# EAGLE board MegaShield_v0.6 (EAGLE 6.4)
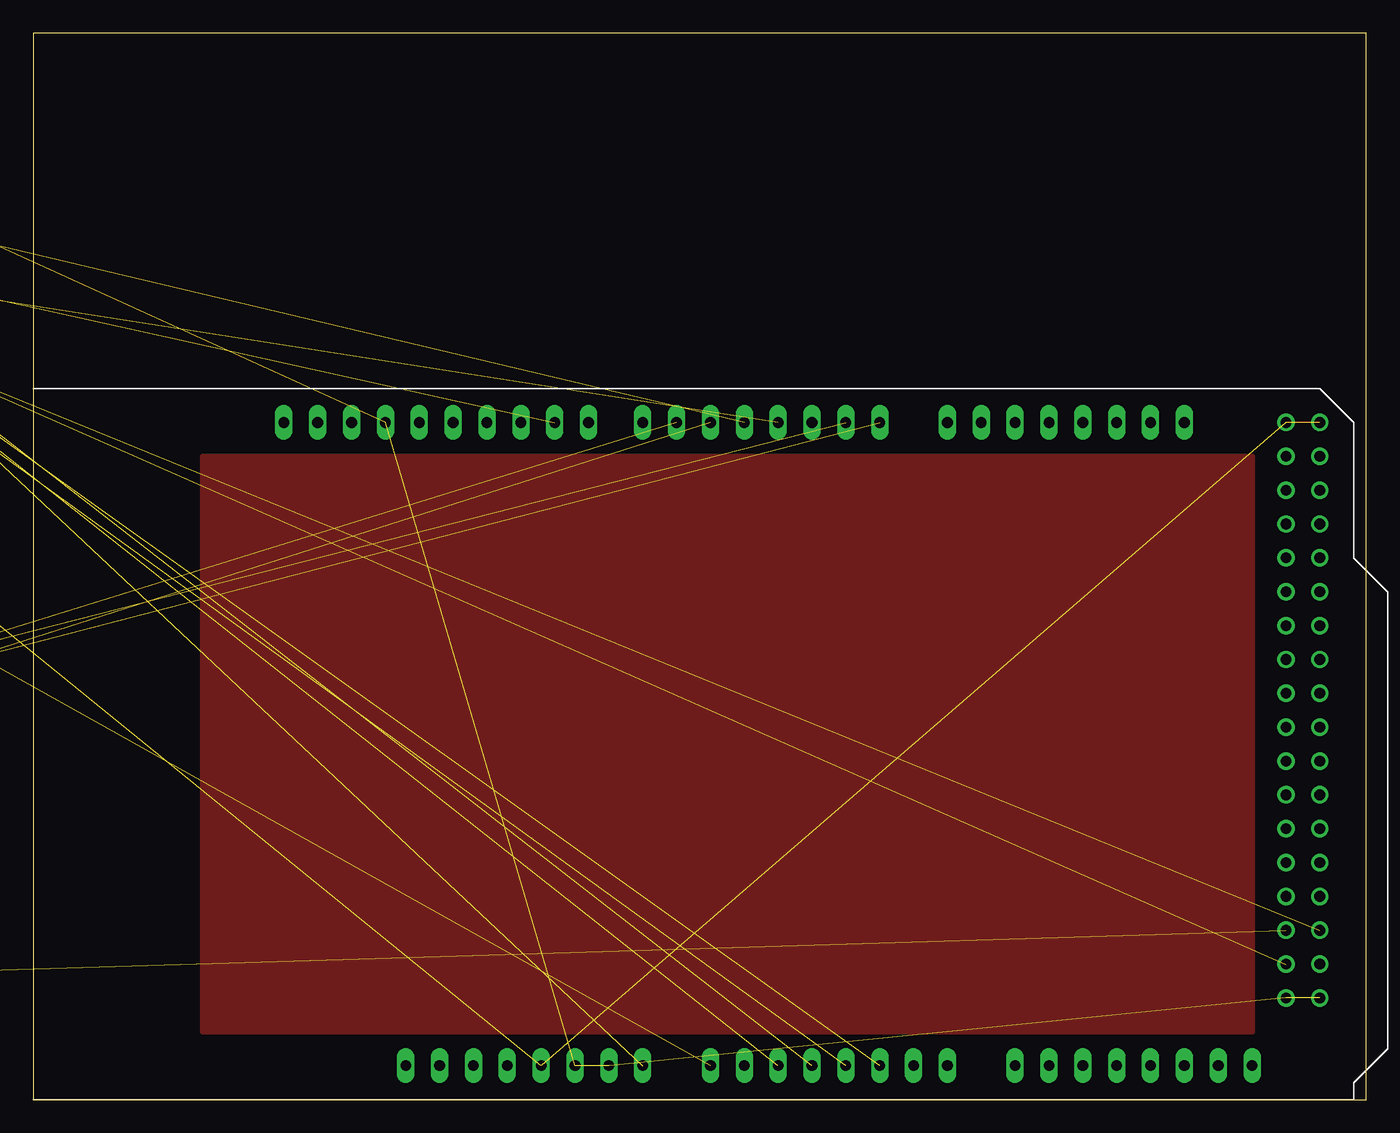
[diagram p0: board, top side]
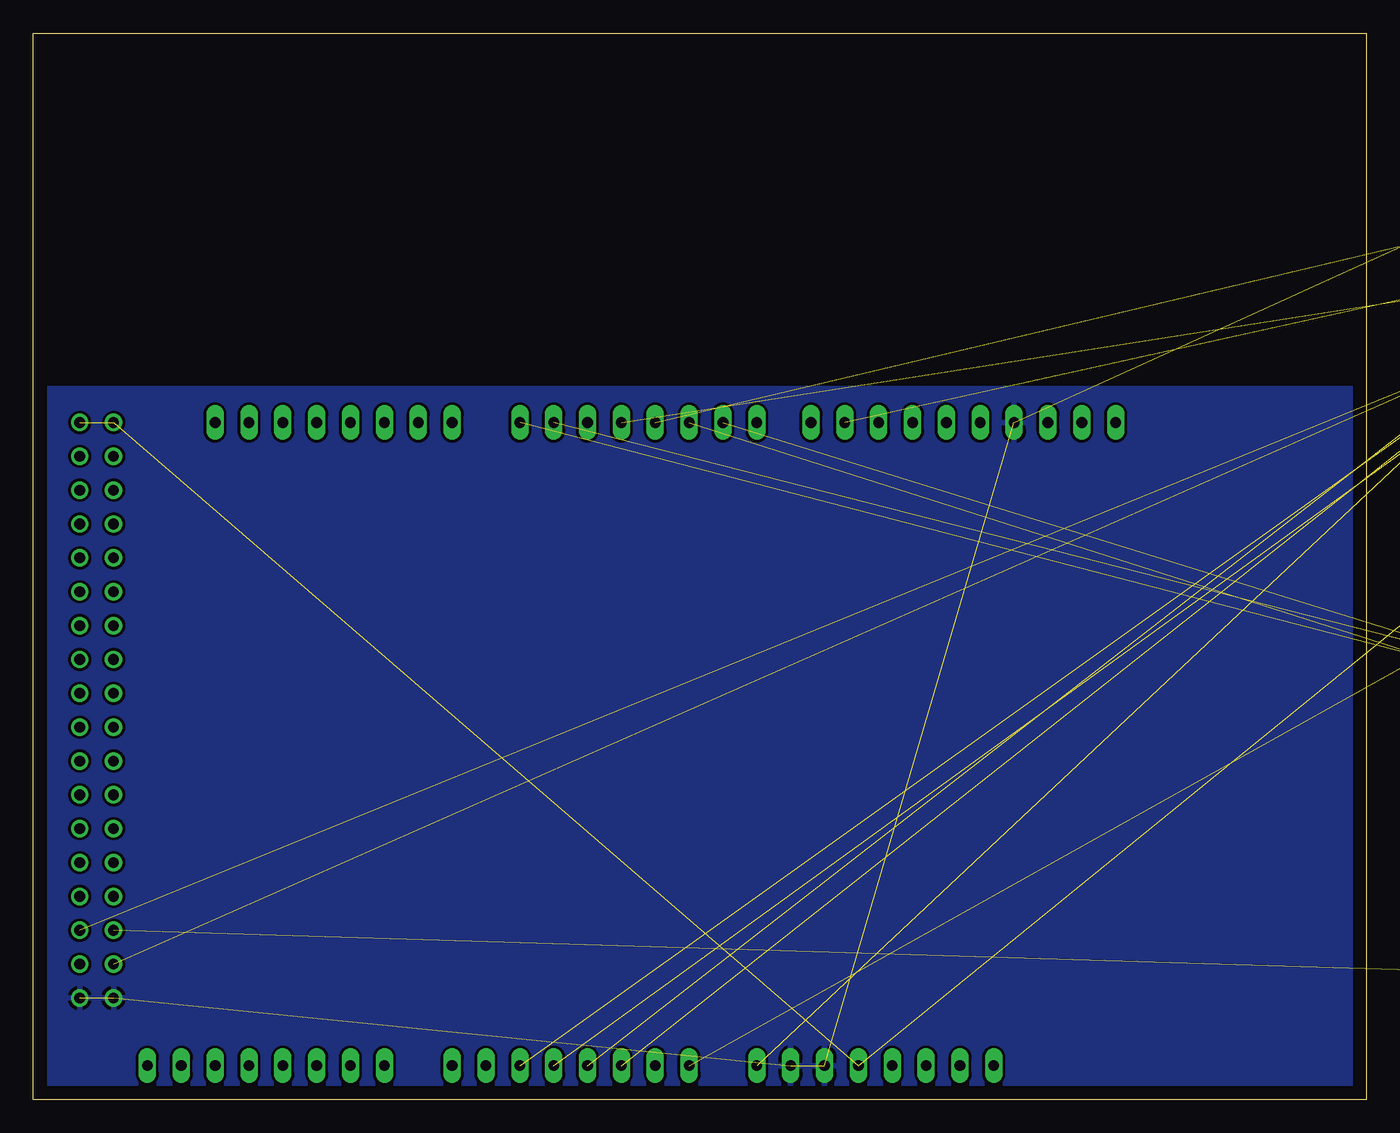
[diagram p1: board, bottom side, seen from below]

Size 100 x 80 mm. Coordinates in mm from the lower left corner, seen from the top.
Outline: 0,0 100,0 100,80 0,80 0,0
Copper layers (1*16): Top 0.035mm / dielectric 1.5mm / Bottom 0.035mm
Design rules "default": minimum track width 10mil, minimum drill 24mil, track to track 8mil, track to pad 8mil, pad to pad 8mil, via to via 8mil, smd to smd 8mil, copper to edge 40mil, drill to drill 8mil, minimum pad ring 10mil, minimum via ring 8mil, stop-mask expansion 4mil, vias tented up to drill 0mil, thermal gap 10mil

## Footprints (pad centres in the part's own frame; a part is rotated, then mirrored left to right if it is on the bottom)
0805 = smd 0.8 x 1.2: 1 -0.9,0; 2 0.9,0
SO16 = smd 0.6 x 1.2: 1 -4.445,-2.8; 2 -3.175,-2.8; 3 -1.905,-2.8; 4 -0.635,-2.8; 5 0.635,-2.8; 6 1.905,-2.8; 7 3.175,-2.8; 8 4.445,-2.8; 9 4.445,2.8; 10 3.175,2.8; 11 1.905,2.8; 12 0.635,2.8; 13 -0.635,2.8; 14 -1.905,2.8; 15 -3.175,2.8; 16 -4.445,2.8
1X16_LOCK = drill 1.016 pad 1.88: 1 0,0.127; 2 2.54,-0.127; 3 5.08,0.127; 4 7.62,-0.127; 5 10.16,0.127; 6 12.7,-0.127; 7 15.24,0.127; 8 17.78,-0.127; 9 20.32,0.127; 10 22.86,-0.127; 11 25.4,0.127; 12 27.94,-0.127; 13 30.48,0.127; 14 33.02,-0.127; 15 35.56,0.127; 16 38.1,-0.127
LED5MM = drill 0.813 pad 1.88: A -1.27,0; K 1.27,0
3362U = drill 1.016 pad 1.88 square: P$1 0,2.54 | drill 1.016 pad 1.88: P$2 2.54,2.54; P$3 5.08,2.54
SOT23 = smd 1 x 1.4: 1 -0.95,-1.1; 2 0.95,-1.1; 3 0,1.1
RJHSE-538X = drill 0.89 square: P1 9.9,2.54 | drill 0.89: P2 8.88,4.32; P3 7.87,2.54; P4 6.85,4.32; P5 5.84,2.54; P6 4.82,4.32; P7 3.81,2.54; P8 2.79,4.32; P9 13.21,9.14; P10 10.92,9.14; P11 1.78,9.14; P12 -0.51,9.14 | hole 3.251: 0,0; 12.7,0 | hole 1.57: -1.78,3.43; 14.48,3.43
2X13 = drill 1.016 pad 1.651: 1 0,0; 2 0,2.54; 3 2.54,0; 4 2.54,2.54; 5 5.08,0; 6 5.08,2.54; 7 7.62,0; 8 7.62,2.54; 9 10.16,0; 10 10.16,2.54; 11 12.7,0; 12 12.7,2.54; 13 15.24,0; 14 15.24,2.54; 15 17.78,0; 16 17.78,2.54; 17 20.32,0; 18 20.32,2.54; 19 22.86,0; 20 22.86,2.54; 21 25.4,0; 22 25.4,2.54; 23 27.94,0; 24 27.94,2.54; 25 30.48,0; 26 30.48,2.54
SKQUAAA010 = drill 1.2 square: 1 0,6.5 | drill 1: 2 0,2.8; 5 10.3,2.8 | drill 1.2: 3 0,0; 4 10.3,0; 6 10.3,6.5
SOP65P640X120-20N = smd 1.473 x 0.356: 1 -2.921,2.921; 2 -2.921,2.286; 3 -2.921,1.626; 4 -2.921,0.965; 5 -2.921,0.33; 6 -2.921,-0.33; 7 -2.921,-0.965; 8 -2.921,-1.626; 9 -2.921,-2.286; 10 -2.921,-2.921; 11 2.921,-2.921; 12 2.921,-2.286; 13 2.921,-1.626; 14 2.921,-0.965; 15 2.921,-0.33; 16 2.921,0.33; 17 2.921,0.965; 18 2.921,1.626; 19 2.921,2.286; 20 2.921,2.921
MEGASHIELD = drill 0.8 long: 3.3V 35.56,2.54; 5V_1 38.1,2.54; A0 50.8,2.54; A1 53.34,2.54; A2 55.88,2.54; A3 58.42,2.54; A4 60.96,2.54; A5 63.5,2.54; A6 66.04,2.54; A7 68.58,2.54; A8 73.66,2.54; A9 76.2,2.54; A10 78.74,2.54; A11 81.28,2.54; A12 83.82,2.54; A13 86.36,2.54; A14 88.9,2.54; A15 91.44,2.54; AREF 23.876,50.8; D2 58.42,50.8; D3 55.88,50.8; D4 53.34,50.8; D5 50.8,50.8; D6 48.26,50.8; D7 45.72,50.8; D8 41.656,50.8; D9 39.116,50.8; D10 36.576,50.8; D11 34.036,50.8; D12 31.496,50.8; D13 28.956,50.8; GND1 40.64,2.54; GND2 43.18,2.54; GND3 26.416,50.8; IOREF 30.48,2.54; NC1 27.94,2.54; NC2 18.796,50.8; NC3 21.336,50.8; RESET 33.02,2.54; RX0 63.5,50.8; RX1 81.28,50.8; RX2 76.2,50.8; RX3 71.12,50.8; SCL 86.36,50.8; SDA 83.82,50.8; TX0 60.96,50.8; TX1 78.74,50.8; TX2 73.66,50.8; TX3 68.58,50.8; V_IN 45.72,2.54 | drill 0.8: 5V_2 93.98,50.8; 5V_3 96.52,50.8; D22 93.98,48.26; D23 96.52,48.26; D24 93.98,45.72; D25 96.52,45.72; D26 93.98,43.18; D27 96.52,43.18; D28 93.98,40.64; D29 96.52,40.64; D30 93.98,38.1; D31 96.52,38.1; D32 93.98,35.56; D33 96.52,35.56; D34 93.98,33.02; D35 96.52,33.02; D36 93.98,30.48; D37 96.52,30.48; D38 93.98,27.94; D39 96.52,27.94; D40 93.98,25.4; D41 96.52,25.4; D42 93.98,22.86; D43 96.52,22.86; D44 93.98,20.32; D45 96.52,20.32; D46 93.98,17.78; D47 96.52,17.78; D48 93.98,15.24; D49 96.52,15.24; D50 93.98,12.7; D51 96.52,12.7; D52 93.98,10.16; D53 96.52,10.16; GND4 93.98,7.62; GND5 96.52,7.62
PS1240P02BT = drill 0.7: A -2.5,0; B 2.5,0

## Placement (x,y rotation side)
C1  0.1uF  [0805]  -223.52,-8.89 0 top  (outside the outline)
C2  0.1uF  [0805]  -151.13,-8.89 0 top  (outside the outline)
C3  0.1uF  [0805]  -227.33,-8.89 0 top  (outside the outline)
IC1  74LS595D  [SO16]  -60.96,74.93 0 top  (outside the outline)
JP1  M16LOCK  [1X16_LOCK]  -53.34,74.93 0 top  (outside the outline)
LED1  GRN  [LED5MM]  -77.47,74.93 0 top  (outside the outline)
LED2  GRN  [LED5MM]  -90.17,74.93 0 top  (outside the outline)
POT  10K  [3362U]  -64.77,57.15 0 top  (outside the outline)
Q1  BC817  [SOT23]  -95.25,73.66 0 top  (outside the outline)
R1  390  [0805]  -212.09,-8.89 0 top  (outside the outline)
R2  680  [0805]  -208.28,-8.89 0 top  (outside the outline)
R3  4K7  [0805]  -204.47,-8.89 0 top  (outside the outline)
R4  1K  [0805]  -196.85,-8.89 0 top  (outside the outline)
R5  2K2  [0805]  -200.66,-8.89 0 top  (outside the outline)
R6  10k 1%  [0805]  -181.61,-8.89 0 top  (outside the outline)
R7  10k 1%  [0805]  -185.42,-8.89 0 top  (outside the outline)
R8  10k 1%  [0805]  -189.23,-8.89 0 top  (outside the outline)
R9  10k 1%  [0805]  -193.04,-8.89 0 top  (outside the outline)
R10  0  [0805]  -215.9,-8.89 0 top  (outside the outline)
R11  10k 1%  [0805]  -219.71,-8.89 0 top  (outside the outline)
R21  390  [0805]  -128.27,-8.89 0 top  (outside the outline)
R22  390  [0805]  -132.08,-8.89 0 top  (outside the outline)
R23  2K2  [0805]  -135.89,-8.89 0 top  (outside the outline)
R25  1K  [0805]  -143.51,-8.89 0 top  (outside the outline)
R26  390  [0805]  -147.32,-8.89 0 top  (outside the outline)
R31  390  [0805]  -177.8,-8.89 0 top  (outside the outline)
RJHSE-538X  RJHSE-338X  [RJHSE-538X]  -29.21,60.96 0 top  (outside the outline)
RPI_JP  M13X22X13  [2X13]  -107.95,-7.62 0 top  (outside the outline)
TACTILE-4  SKQUAAA010  [SKQUAAA010]  -57.15,57.15 0 top  (outside the outline)
U1  TXB0108PWR  [SOP65P640X120-20N]  -104.14,6.35 0 top  (outside the outline)
U$1  MEGASHILED  [MEGASHIELD]  0,0 0 top
U$4  PS1240P02BT  [PS1240P02BT]  -39.37,60.96 0 top  (outside the outline)

## Library data of the parts
C1 C3 = SparkFun-Passives
C2 = SparkFun-Capacitors
IC1 = SparkFun-DigitalIC
JP1 RPI_JP = SparkFun-Connectors
LED1 LED2 = SparkFun-LED
POT = SparkFun-Electromechanical
Q1 = SparkFun-DiscreteSemi
R1-R11 R21-R23 R25 R26 R31 = SparkFun-Resistors
RJHSE-538X = MyLib; DESCRIPTION: RJ45; PART_NAME: RJHSE-538X
TACTILE-4 = MyLib; DESCRIPTION: TACTILE-4
U1 = Texas Instruments_By_element14_Batch_1; DESCRIPT: Bi-directional Logic Level Converter; MPN: TXB0108PWR; OC_FARNELL: 1494945; OC_NEWARK: 27M1151; PACKAGE: TSSOP-20; SUPPLIER: Texas Instruments
U$1 = Arduino; DESCRIPTION: MEGA SHIELD
U$4 = MyLib

## Nets
3.3V_PI: C3.2 RPI_JP.1 U1.2
12V: RJHSE-538X.P1 U$1.V_IN
ALARM: R25.1 U$1.D6
BLOWER: R22.1 RJHSE-538X.P7 U$1.D3
BUTTONS: R4.1 TACTILE-4.4 U$1.A0
EXPERIMENTAL_SERVO_PIN18: RJHSE-538X.P8 U$1.D9
FOOD1: R8.2 RJHSE-538X.P5 U$1.A4
FOOD2: R7.2 RJHSE-538X.P4 U$1.A3
FOOD3: R6.2 RJHSE-538X.P3 U$1.A2
GND: C1.1 C2.1 C3.1 IC1.8 IC1.13 JP1.1 JP1.5 LED1.K LED2.K POT.P$3 Q1.2 R4.2 R11.2 RJHSE-538X.P2 RJHSE-538X.P9 RJHSE-538X.P11 RPI_JP.6 U1.11 U$1.GND1 U$1.GND2 U$1.GND3 U$1.GND4 U$1.GND5 U$4.A
LCD_BKLT: R23.1 U$1.D5
LCD_CLK: IC1.12 U$1.D4
MISO: U1.16 U$1.D50
MOSI: IC1.14 U1.17 U$1.D51
N$1: R22.2 RJHSE-538X.P12
N$2: R21.2 RJHSE-538X.P10
N$3: R25.2 U$4.B
N$4: LED2.A R1.2
N$5: IC1.7 JP1.14
N$6: IC1.6 JP1.13
N$7: IC1.5 JP1.12
N$8: R2.1 TACTILE-4.1
N$9: R3.1 TACTILE-4.2
N$10: R5.1 TACTILE-4.3
N$11: R31.1 TACTILE-4.5
N$12: IC1.4 JP1.11
N$13: IC1.3 JP1.6
N$14: IC1.2 JP1.4
N$15: JP1.15 R10.2
N$16: LED1.A R26.2
N$17: JP1.16 Q1.3
N$18: RPI_JP.10 U1.1
N$19: JP1.3 POT.P$2
N$21: IC1.15 R26.1
N$22: IC1.1 R1.1
N$23: Q1.1 R23.2
N$25: RPI_JP.8 U1.3
N$26: R11.1 U1.10
N$27: RPI_JP.19 U1.4
N$28: RPI_JP.21 U1.5
N$29: RPI_JP.23 U1.6
PIT: R9.2 RJHSE-538X.P6 U$1.A5
RX: U1.18 U$1.RX0
SCK: IC1.11 U1.15 U$1.D52
TX: U1.20 U$1.TX0
VCC: C1.2 C2.2 IC1.10 IC1.16 JP1.2 POT.P$1 R2.2 R3.2 R5.2 R6.1 R7.1 R8.1 R9.1 R10.1 R21.1 R31.2 RPI_JP.2 U1.19 U$1.5V_1 U$1.5V_2 U$1.5V_3

## Tracks (layer width: path | path; a pad name or v marks a point on that pad's centre or on a via)
3.3V_PI  (2 unrouted)
12V  (1 unrouted)
ALARM  (1 unrouted)
BLOWER  (2 unrouted)
BUTTONS  (2 unrouted)
EXPERIMENTAL_SERVO_PIN18  (1 unrouted)
FOOD1  (2 unrouted)
FOOD2  (2 unrouted)
FOOD3  (2 unrouted)
GND  (23 unrouted)
  pour Bottom: 0,0 0,53.34 99.06,53.34 99.06,0
LCD_BKLT  (1 unrouted)
LCD_CLK  (1 unrouted)
MISO  (1 unrouted)
MOSI  (2 unrouted)
N$1  (1 unrouted)
N$2  (1 unrouted)
N$3  (1 unrouted)
N$4  (1 unrouted)
N$5  (1 unrouted)
N$6  (1 unrouted)
N$7  (1 unrouted)
N$8  (1 unrouted)
N$9  (1 unrouted)
N$10  (1 unrouted)
N$11  (1 unrouted)
N$12  (1 unrouted)
N$13  (1 unrouted)
N$14  (1 unrouted)
N$15  (1 unrouted)
N$16  (1 unrouted)
N$17  (1 unrouted)
N$18  (1 unrouted)
N$19  (1 unrouted)
N$21  (1 unrouted)
N$22  (1 unrouted)
N$23  (1 unrouted)
N$25  (1 unrouted)
N$26  (1 unrouted)
N$27  (1 unrouted)
N$28  (1 unrouted)
N$29  (1 unrouted)
PIT  (2 unrouted)
RX  (1 unrouted)
SCK  (2 unrouted)
TX  (1 unrouted)
VCC  (20 unrouted)
  pour Top: 91.44,48.26 12.7,48.26 12.7,5.08 91.44,5.08 91.44,6.35